# Altium PCB Preamp.PcbDoc
Units mil, origin at the board's own origin, x right, y up, seen from the top; angles counter-clockwise.
Board outline 1500 x 500 mil, 2 copper layers (Top Layer, Bottom Layer); 15 components, 12 nets, 45 pads, 11 vias.
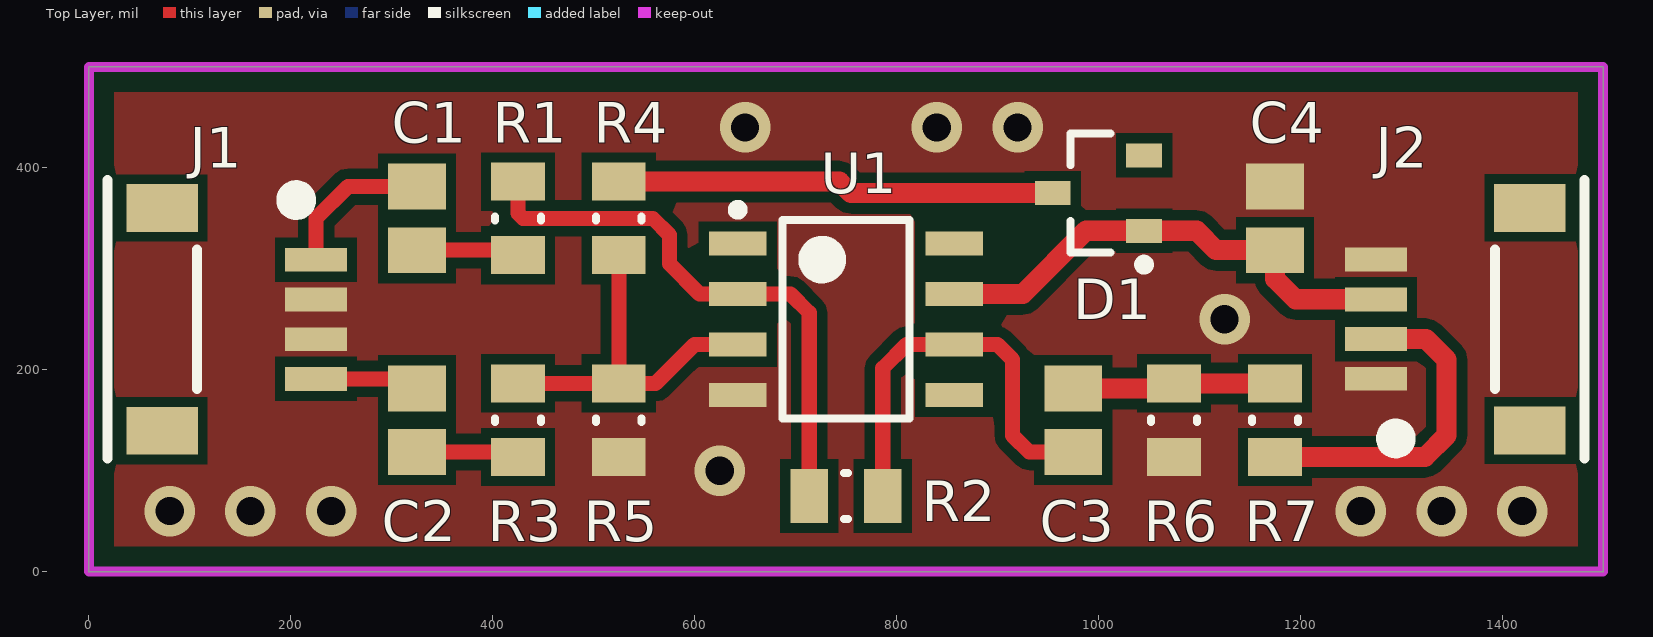
[diagram p0: Top Layer view]
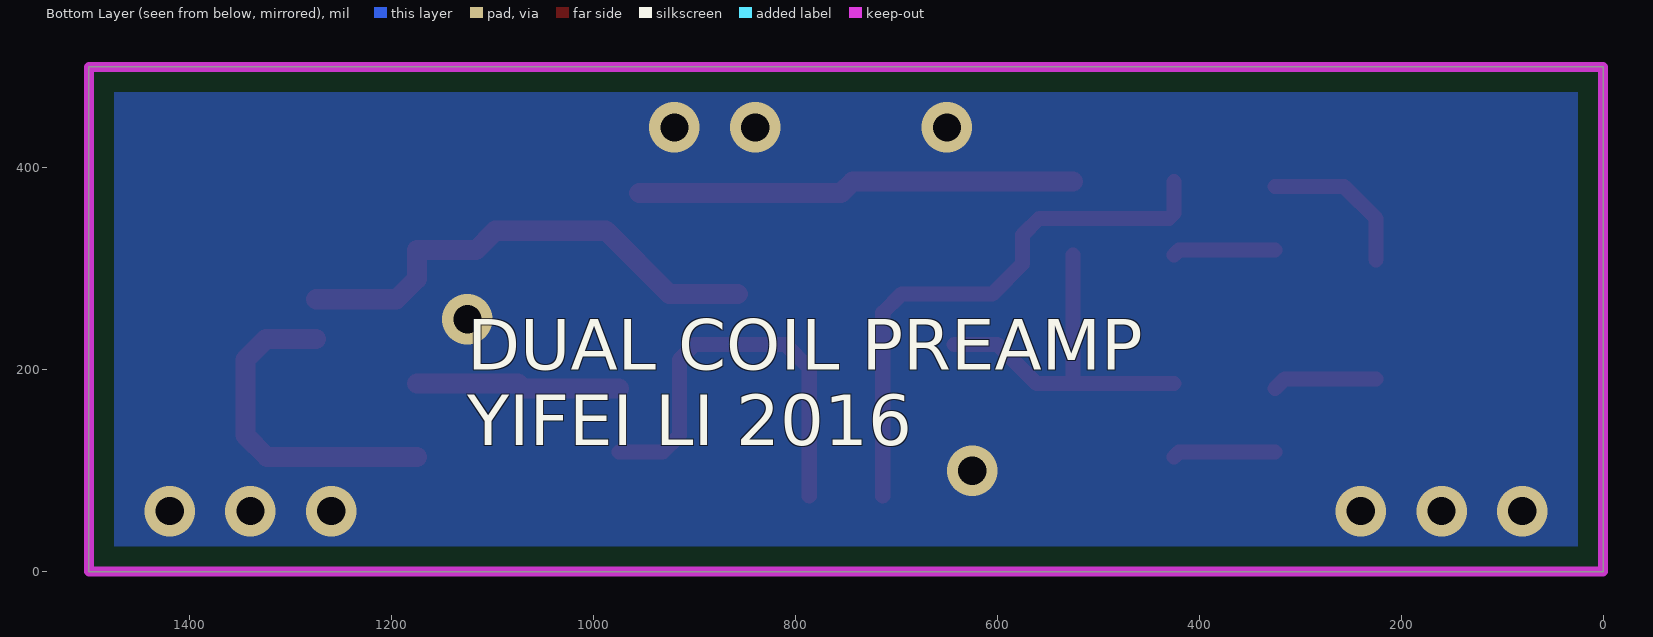
[diagram p1: Bottom Layer view, seen from below]

## Layer stack, top to bottom
Top Solder: solder mask 0.4, Solder Resist, Dk 3.5
Top Layer: signal copper 1.4
Dielectric 1: dielectric 12.6, FR-4, Dk 4.8
Bottom Layer: signal copper 1.4
Bottom Solder: solder mask 0.4, Solder Resist, Dk 3.5

## Board outline
0,0 1500,0 1500,500 0,500

## Design rules (kind name [scope] priority, off if disabled: settings)
Clearance [All] p1: gap=10
PolygonConnect [All] p1: connectstyle=Direct reliefconductorwidth=20 reliefentries=4 polygonreliefangle="90 Angle" airgapwidth=10
RoutingVias [All] p1: holewidth=28 width=50 viastyle="Through Hole" minholewidth=28 minwidth=50 maxholewidth=28 maxwidth=50
SolderMaskExpansion [All] p1: expansion=4
Width [All] p1: maxlimit=50 minlimit=10 preferedwidth=20
30 further rules are at their usual default settings.

## Components (designator, comment, footprint, x,y, rotation, side; value= is the part's Value field where it differs from the comment)
C1 "22n" CAPC2012X09N 325,350 r270 top
C2 "22n" CAPC2012X09N 325,150 r270 top
C3 "1uF" CAPC2012X09N 975,150 r90 top
C4 "10n" CAPC2012X09N 1175,350 r270 top
D1 "MMBD701" SOT95P230X110-3N 1000,375 r180 top
J1 "Input Connector" "SM04B - all pins" 225,309 r270 top
J2 "Output Connector" "SM04B - all pins" 1275,191 r90 top
R1 "30K" RESC2012X06N 425,350 r90 top
R2 "150k" RESC2012X06N 750,75 r0 top
R3 "30K" RESC2012X06N 425,150 r90 top
R4 "137k" RESC2012X06N 525,350 r90 top
R5 "137k" RESC2012X06N 525,150 r270 top
R6 "47k" RESC2012X06N 1075,150 r90 top
R7 "10K" RESC2012X06N 1175,150 r90 top
U1 "OPA191" SOIC127P600X175-8N 750,250 r0 top

## Footprints (in the part's own frame and the unit in brackets; to place one, negate y for a bottom-side part, rotate by r counter-clockwise, add the part's x,y. Pads: shape width x height; smd on the part's side, far side on the other; paste and mask are expansions set on the pad)
CAPC2012X09N [mm] "Chip Capacitor, 2-Leads, Body 2.00x1.25mm, IPC Medium Density"
  rect 1.15x1.45 smd: 1(-0.8,0) 2(0.8,0)
  body extent -1.1,-0.72 1.1,0.72, height 0.9
RESC2012X06N [mm] "Chip Resistor, 2-Leads, Body 2.00x1.25mm, IPC Medium Density"
  rect 0.95x1.35 smd: 1(-0.925,0) 2(0.925,0)
  silkscreen extent -0.05,-0.58 0.05,0.58, body extent -1.05,-0.67 1.05,0.67, height 0.6
"SM04B - all pins" [mm] "JST 4 POS 1MM"
  rect 0.6x1.55 smd: 1(0,0) 2(1,0) 3(2,0) 4(3,0)
  rect 1.2x1.8 smd: ""(-1.3,-3.875) ""(4.3,-3.875)
  silkscreen extent -2,-5.25 5,-0.25, body extent -1.5,-4.69 4.5,0.26, height 2.96
SOIC127P600X175-8N [mm] "SOIC, 8-Leads, Body 4.90x3.90mm, Pitch 1.27mm, IPC Medium Density"
  rect 1.45x0.6 smd: 1(-2.725,1.905) 2(-2.725,0.635) 3(-2.725,-0.635) 4(-2.725,-1.905) 5(2.725,-1.905) 6(2.725,-0.635) 7(2.725,0.635) 8(2.725,1.905)
  silkscreen extent -2.85,-2.5 1.6,2.88, body extent -2,-2.5 2,2.5, height 1.75
SOT95P230X110-3N [mm] "SOT23, 3-Leads, Body 2.90x2.30mm, Pitch 0.95mm, IPC Medium Density"
  rect 0.9x0.6 smd: 1(-1.15,0.95) 2(-1.15,-0.95) 3(1.15,0)
  silkscreen extent -1.28,-1.5 0.7,1.92, body extent -0.7,-1.5 0.7,1.5, height 1.1

## Part data
C1 C2 C4: library part "CAP 0805", "CAP 0805"
C3: library part "CAP 1uF 0805", "CAP 1uF 0805"
D1: "SOT-23 Schottky Diode"
R1 R3: library part "RES 30K 0805", "RES 30K 0805"
R2 R4 R5: library part "RES 0805", "RES 0805"
R6: library part "RES 47K 0805", "RES 47K 0805"
R7: library part "RES 10K 0805", "RES 10K 0805"
U1: library part OPA191_SOIC, "Low Power CMOS Amp"

## Via types
v1: diameter 50, hole 28, Top Layer to Bottom Layer, tented both sides, 11 vias

## Nets (pads, with @x,y where several pads share a name; then routed paths per layer and width w, separated by ;. In a path a pad name is that pad's centre, name@x,y a point inside that pad or via, vN(x,y) a via of type N, cw(c..) or ccw(c..) an arc to the next point about the centre after c; other vN are vias at no path point)
GND: C4.1 J1.2 J1.3 J2.1 J2.4 R5.2 R6.1 U1.4
  other v1: 80,60 160,60 240,60 1260,60 1340,60 1420,60 625,100 1125,250 650,440 840,440 920,440
NetC1_1: C1.1 J1.1 | length 154
  Top Layer w15: J1.1 225,350 256.5,381.5 C1.1
NetC1_2: C1.2 R1.1 | length 102
  Top Layer w15: C1.2 420.08,318.5 R1.1
NetC2_1: C2.1 J1.4 | length 103.9
  Top Layer w15: J1.4 315.61,190.89 C2.1
NetC2_2: C2.2 R3.1 | length 102
  Top Layer w15: C2.2 420.08,118.5 R3.1
NetC3_1: C3.1 R2.2 U1.6 | length 412.8
  Top Layer w15: R2.2 786.42,201.42 810,225 U1.6 900,225 915,210 915,135 931.5,118.5 C3.1
NetC3_2: C3.2 R6.2 R7.2 | length 202
  Top Layer w20: C3.2 1070.08,181.5 R6.2 R7.2
NetD1_3: D1.3 R4.2 | length 434.5
  Top Layer w20: R4.2 743.58,386.42 755,375 D1.3
NetR1_2: R1.2 R2.1 U1.2 | length 559
  Top Layer w15: R1.2 425,355 430,350 558.61,350 575,333.61 575,305 605,275 U1.2 695,275 713.58,256.42 R2.1
NetR3_2: R3.2 R4.1 R5.1 U1.3 | length 360.9
  Top Layer w15: R3.2 R5.1 ; R4.1 R5.1 ; U1.3 600,225 561.42,186.42 R5.1
OUT+: J2.2 R7.1 | length 332.3
  Top Layer w20: R7.1 1323.58,113.58 1345,135 1345,210 1324.63,230.37 J2.2
V+: C4.2 D1.1 J2.3 U1.7 | length 488.5
  Top Layer w20: U1.7 925,275 987.6,337.6 D1.1 1097.4,337.6 1116.5,318.5 C4.2 1175,290 1195.26,269.74 J2.3
pads on no net: D1.2 J1. J2. U1.1 U1.5 U1.8

## Polygon pours and split planes (outlines as drawn)
GND on Top Layer "GND_TOP" (solid, pour order 4): 25,475 1475,475 1475,25 25,25 25,475
GND on Bottom Layer "GND_BOTTOM" (solid, pour order 6): 25,475 1475,475 1475,25 25,25 25,475

## Keep-outs
Keep-Out Layer:
  the board outline again, w10

## Silkscreen, mask and mechanical layers (free items; w line width, h text height)
Bottom Overlay:
  text "DUAL COIL PREAMP / YIFEI LI 2016" at 1125,125 h50